# EAGLE board pacman (EAGLE 6.6.0)
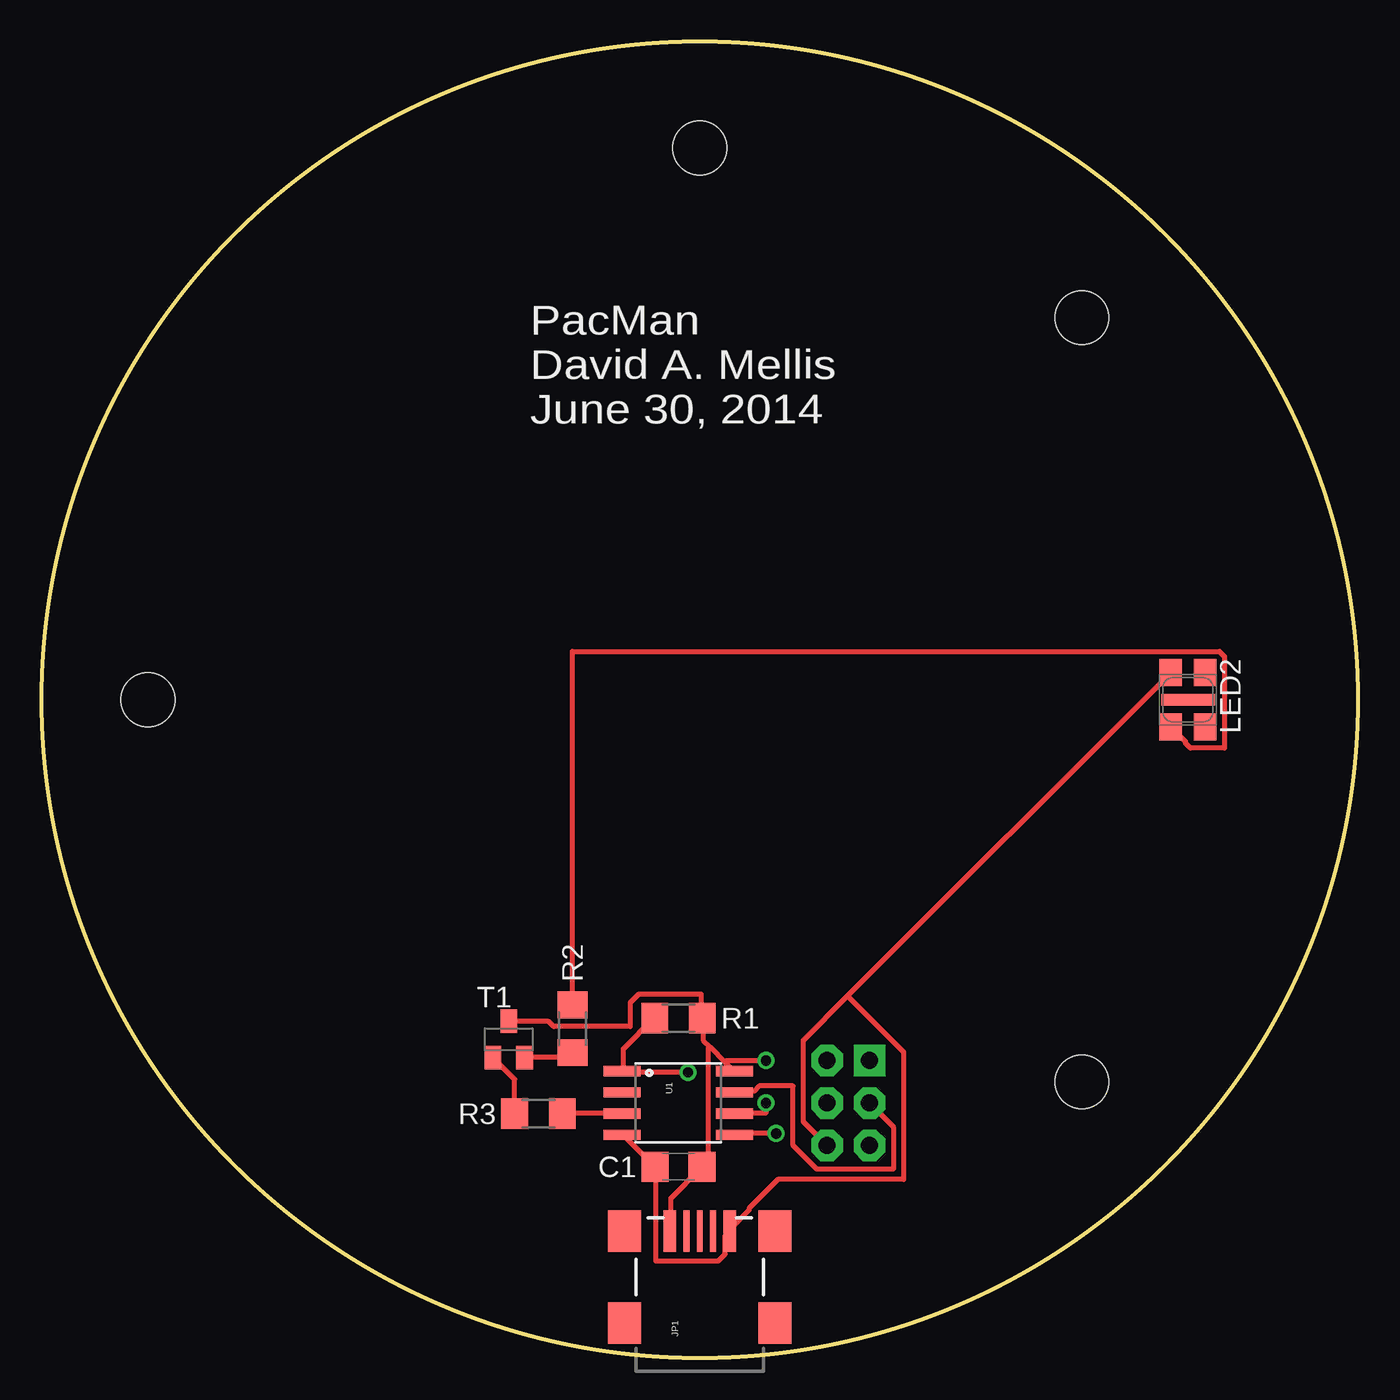
[diagram p0: board, top side]
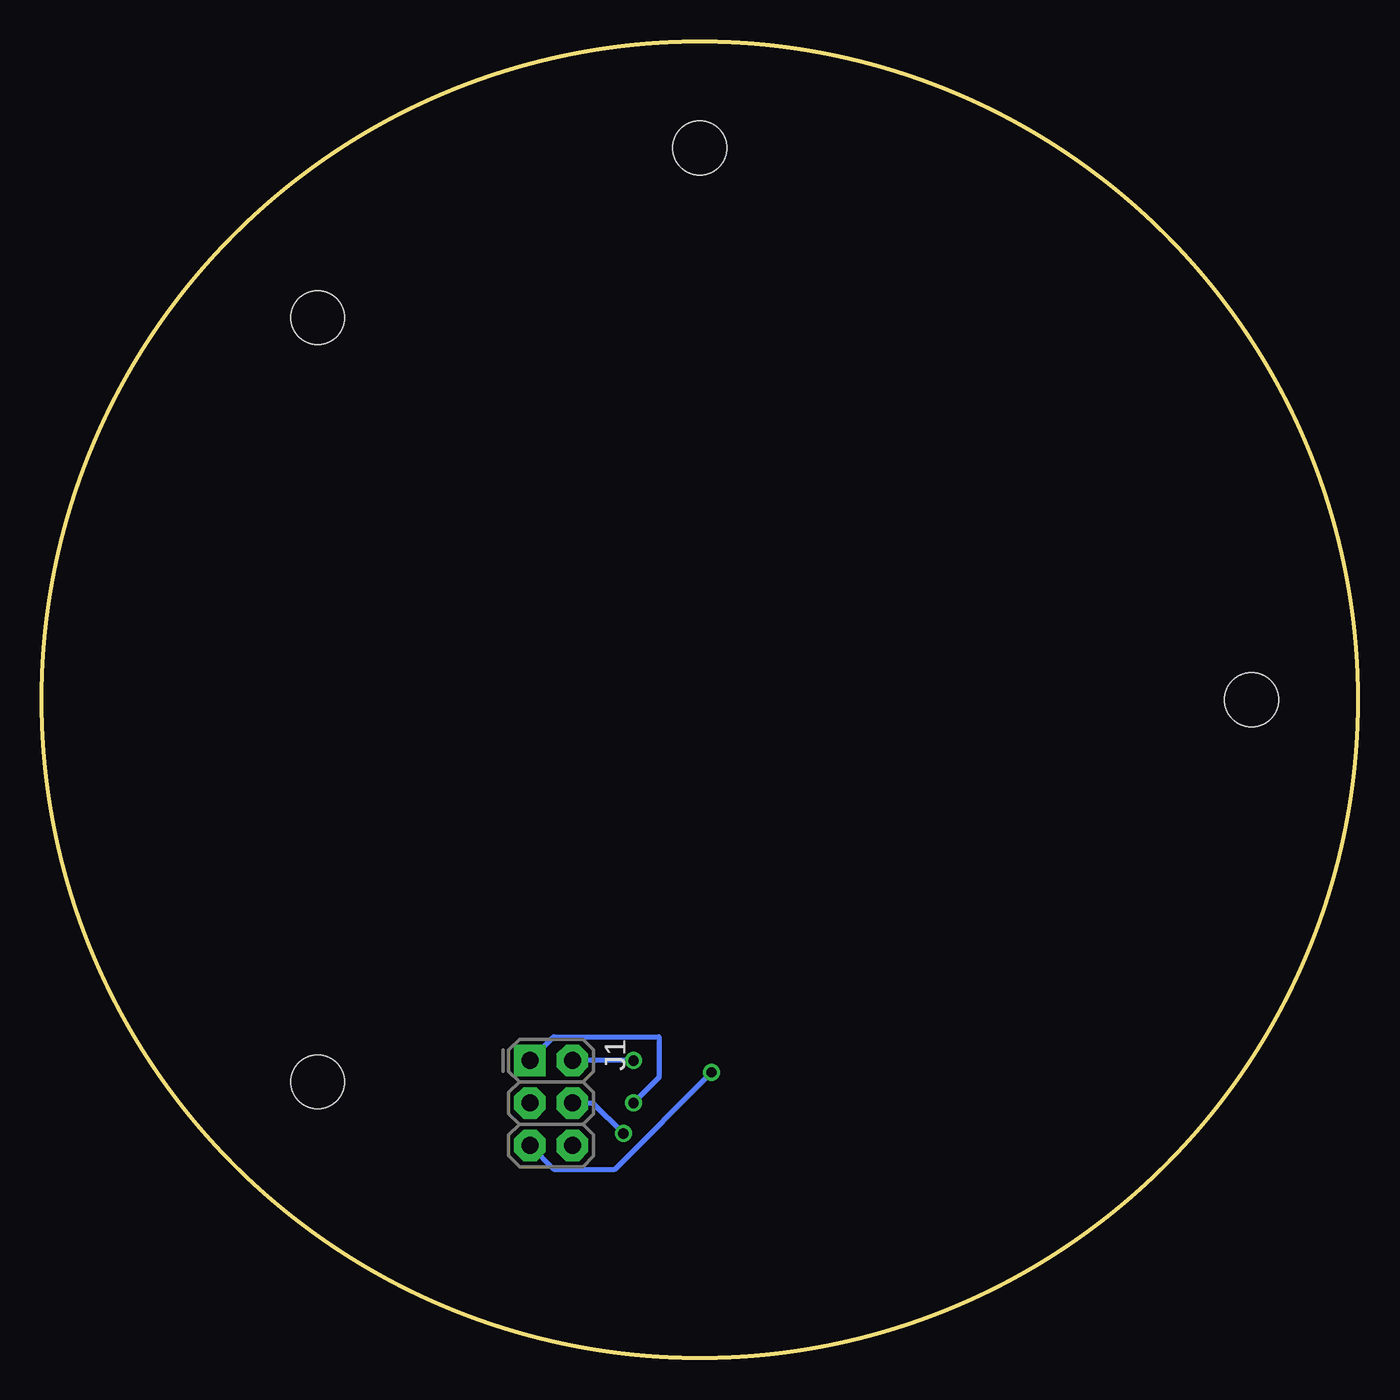
[diagram p1: board, bottom side, seen from below]

Size 78.74 x 78.74 mm. Coordinates in mm from the lower left corner, seen from the top.
Outline: circle at 39.37,39.37 radius 39.37
Copper layers (1*16): Top 0.035mm / dielectric 1.5mm / Bottom 0.035mm
Design rules "default *": minimum track width 12mil, minimum drill 24mil, track to track 12mil, track to pad 12mil, pad to pad 12mil, via to via 12mil, smd to smd 8mil, copper to edge 40mil, drill to drill 8mil, minimum pad ring 10mil, minimum via ring 8mil, stop-mask expansion 4mil, vias tented up to drill 0mil, thermal gap 10mil
Holes 3.2 mm at 6.35,39.37 62.23,16.51 62.23,62.23 39.37,72.39

## Footprints (pad centres in the part's own frame; a part is rotated, then mirrored left to right if it is on the bottom)
C1206 = smd 1.6 x 1.8: 1 -1.4,0; 2 1.4,0
2X3-NS = drill 1.016 pad 1.88 square: 1 -2.54,-1.27 | drill 1.016 pad 1.88 octagon: 2 -2.54,1.27; 3 0,-1.27; 4 0,1.27; 5 2.54,-1.27; 6 2.54,1.27
USB_MINIB_POWER = smd 2.5 x 0.35: D+ 3.77,0; D- 3.77,0.8; ID 3.77,-0.8 | smd 2.5 x 0.75: GND 3.77,-1.8; VBUS 3.77,1.8 | smd 2.5 x 2: SHIELD@1 -1.73,-4.5; SHIELD@2 -1.73,4.5; SHIELD@3 3.77,4.5; SHIELD@4 3.77,-4.5
ML-E-FAB = smd 1.6 x 1.35: A@1 1.625,-1.025; A@2 1.625,1.025; C@1 -1.625,-1.025; C@2 -1.625,1.025 | smd 0.7 x 3.2: TH 0,0
R1206 = smd 1.6 x 1.803: 1 -1.422,0; 2 1.422,0
SOT23-BEC = smd 1 x 1.4: B -0.95,-1.1; C 0,1.1; E 0.95,-1.1
SO08-EIAJ = smd 0.61 x 2.21: 1 -1.905,-3.378; 2 -0.635,-3.378; 3 0.635,-3.378; 4 1.905,-3.378; 5 1.905,3.353; 6 0.635,3.353; 7 -0.635,3.353; 8 -1.905,3.353

## Placement (x,y rotation side)
C1  1.0uF  [C1206]  38.1,11.43 180 top
J1  AVR_SPI_PRG_6NS  [2X3-NS]  48.26,15.24 270 bottom
JP1  USB_MINIB-POWER  [USB_MINIB_POWER]  39.37,3.81 90 top
LED2  ML-EFAB  [ML-E-FAB]  68.58,39.37 270 top
R1  10K  [R1206]  38.1,20.32 0 top
R2  24  [R1206]  31.75,19.68 270 top
R3  1K  [R1206]  29.72,14.61 180 top
T1  [SOT23-BEC]  27.94,19.05 0 top
U1  Tiny85-20-SMT  [SO08-EIAJ]  38.1,15.24 270 top

## Library data of the parts
C1 R1-R3 = rcl
J1 = SparkFun-Connectors
JP1 LED2 = LED Light
T1 = transistor
U1 = SparkFun-DigitalIC; PROD_ID: IC-09092

## Nets
GND: C1.2 J1.6 JP1.GND LED2.C@1 U1.4
MISO: J1.1 U1.6
MOSI: J1.4 U1.5
N$1: R2.2 T1.E
N$2: R3.2 T1.B
N$3: LED2.A@1 R2.1
N$4: R3.1 U1.3
RESET: J1.5 R1.1 U1.1
SCK: J1.3 U1.7
VCC: C1.1 J1.2 JP1.VBUS R1.2 T1.C U1.8

## Tracks (layer width: path | path; a pad name or v marks a point on that pad's centre or on a via)
GND
  Top 0.305: U1.4 34.8,13.31 36.63,11.48 C1.2 36.73,11.38 36.73,5.79 40.49,5.79 40.89,6.2 40.89,7.32 41.1,7.52 JP1.GND 41.2,7.72 42.32,8.84 42.32,8.94 44.04,10.67 51.56,10.67 51.56,18.29 48.21,21.64 | 48.21,21.64 45.57,19 45.57,14.12 J1.6 | 48.21,21.64 67.51,40.95 LED2.C@1
MISO  (via drill 0.61)
  Top 0.305: v43.33,15.24 43.33,14.63 41.5,14.63 U1.6
  Bottom 0.305: v43.33,15.24 41.81,16.76 41.81,19.2 48.11,19.2 J1.1
MOSI  (via drill 0.61)
  Top 0.305: v43.94,13.41 41.5,13.41 U1.5
  Bottom 0.305: v43.94,13.41 45.77,15.24 J1.4
N$1
  Top 0.305: R2.2 31.75,17.98 28.9,17.98 T1.E
N$2
  Top 0.305: T1.B 27.08,17.88 28.3,16.66 28.3,14.63 R3.2
N$3
  Top 0.305: R2.1 31.75,42.27 70.46,42.27 70.76,41.96 70.76,36.47 68.73,36.47 68.43,36.78 68.43,36.88 67.61,37.69 LED2.A@1
N$4
  Top 0.305: R3.1 31.14,14.63 34.7,14.63 U1.3
RESET  (via drill 0.61)
  Top 0.305: R1.1 36.63,20.32 34.8,18.49 34.8,17.17 U1.1 34.9,17.07 v38.66,17.07
  Bottom 0.305: v38.66,17.07 44.45,11.28 48.11,11.28 J1.5
SCK
  Top 0.305: J1.3 50.95,13.82 50.95,11.28 46.38,11.28 44.96,12.7 44.96,16.26 42.93,16.26 42.62,15.95 41.5,15.95 U1.7
VCC  (via drill 0.61)
  Top 0.305: JP1.VBUS 37.64,7.62 37.64,9.55 39.47,11.38 C1.1 39.57,11.48 39.88,11.79 39.88,18.49 39.98,18.59 | T1.C 27.99,20.12 30.33,20.12 30.63,19.81 35.2,19.81 35.2,21.23 35.71,21.74 39.47,21.74 39.47,20.32 R1.2 39.57,20.22 39.57,19 39.98,18.59 | 39.98,18.59 40.89,17.68 | 40.89,17.68 41.4,17.17 U1.8 | v43.33,17.78 41,17.78 40.89,17.68
  Bottom 0.305: v43.33,17.78 J1.2

## Text on the board
tNames: PacMan / David A. Mellis / June 30, 2014